# Altium PCB Master.PcbDoc (part 1 of 2)
Units mil, origin at the board's own origin, x right, y up, seen from the top; angles counter-clockwise.
Board outline 11420.03 x 8220.01 mil, 2 copper layers (Top Layer, Bottom Layer); 224 components, 0 nets, 1169 pads, 54 vias.
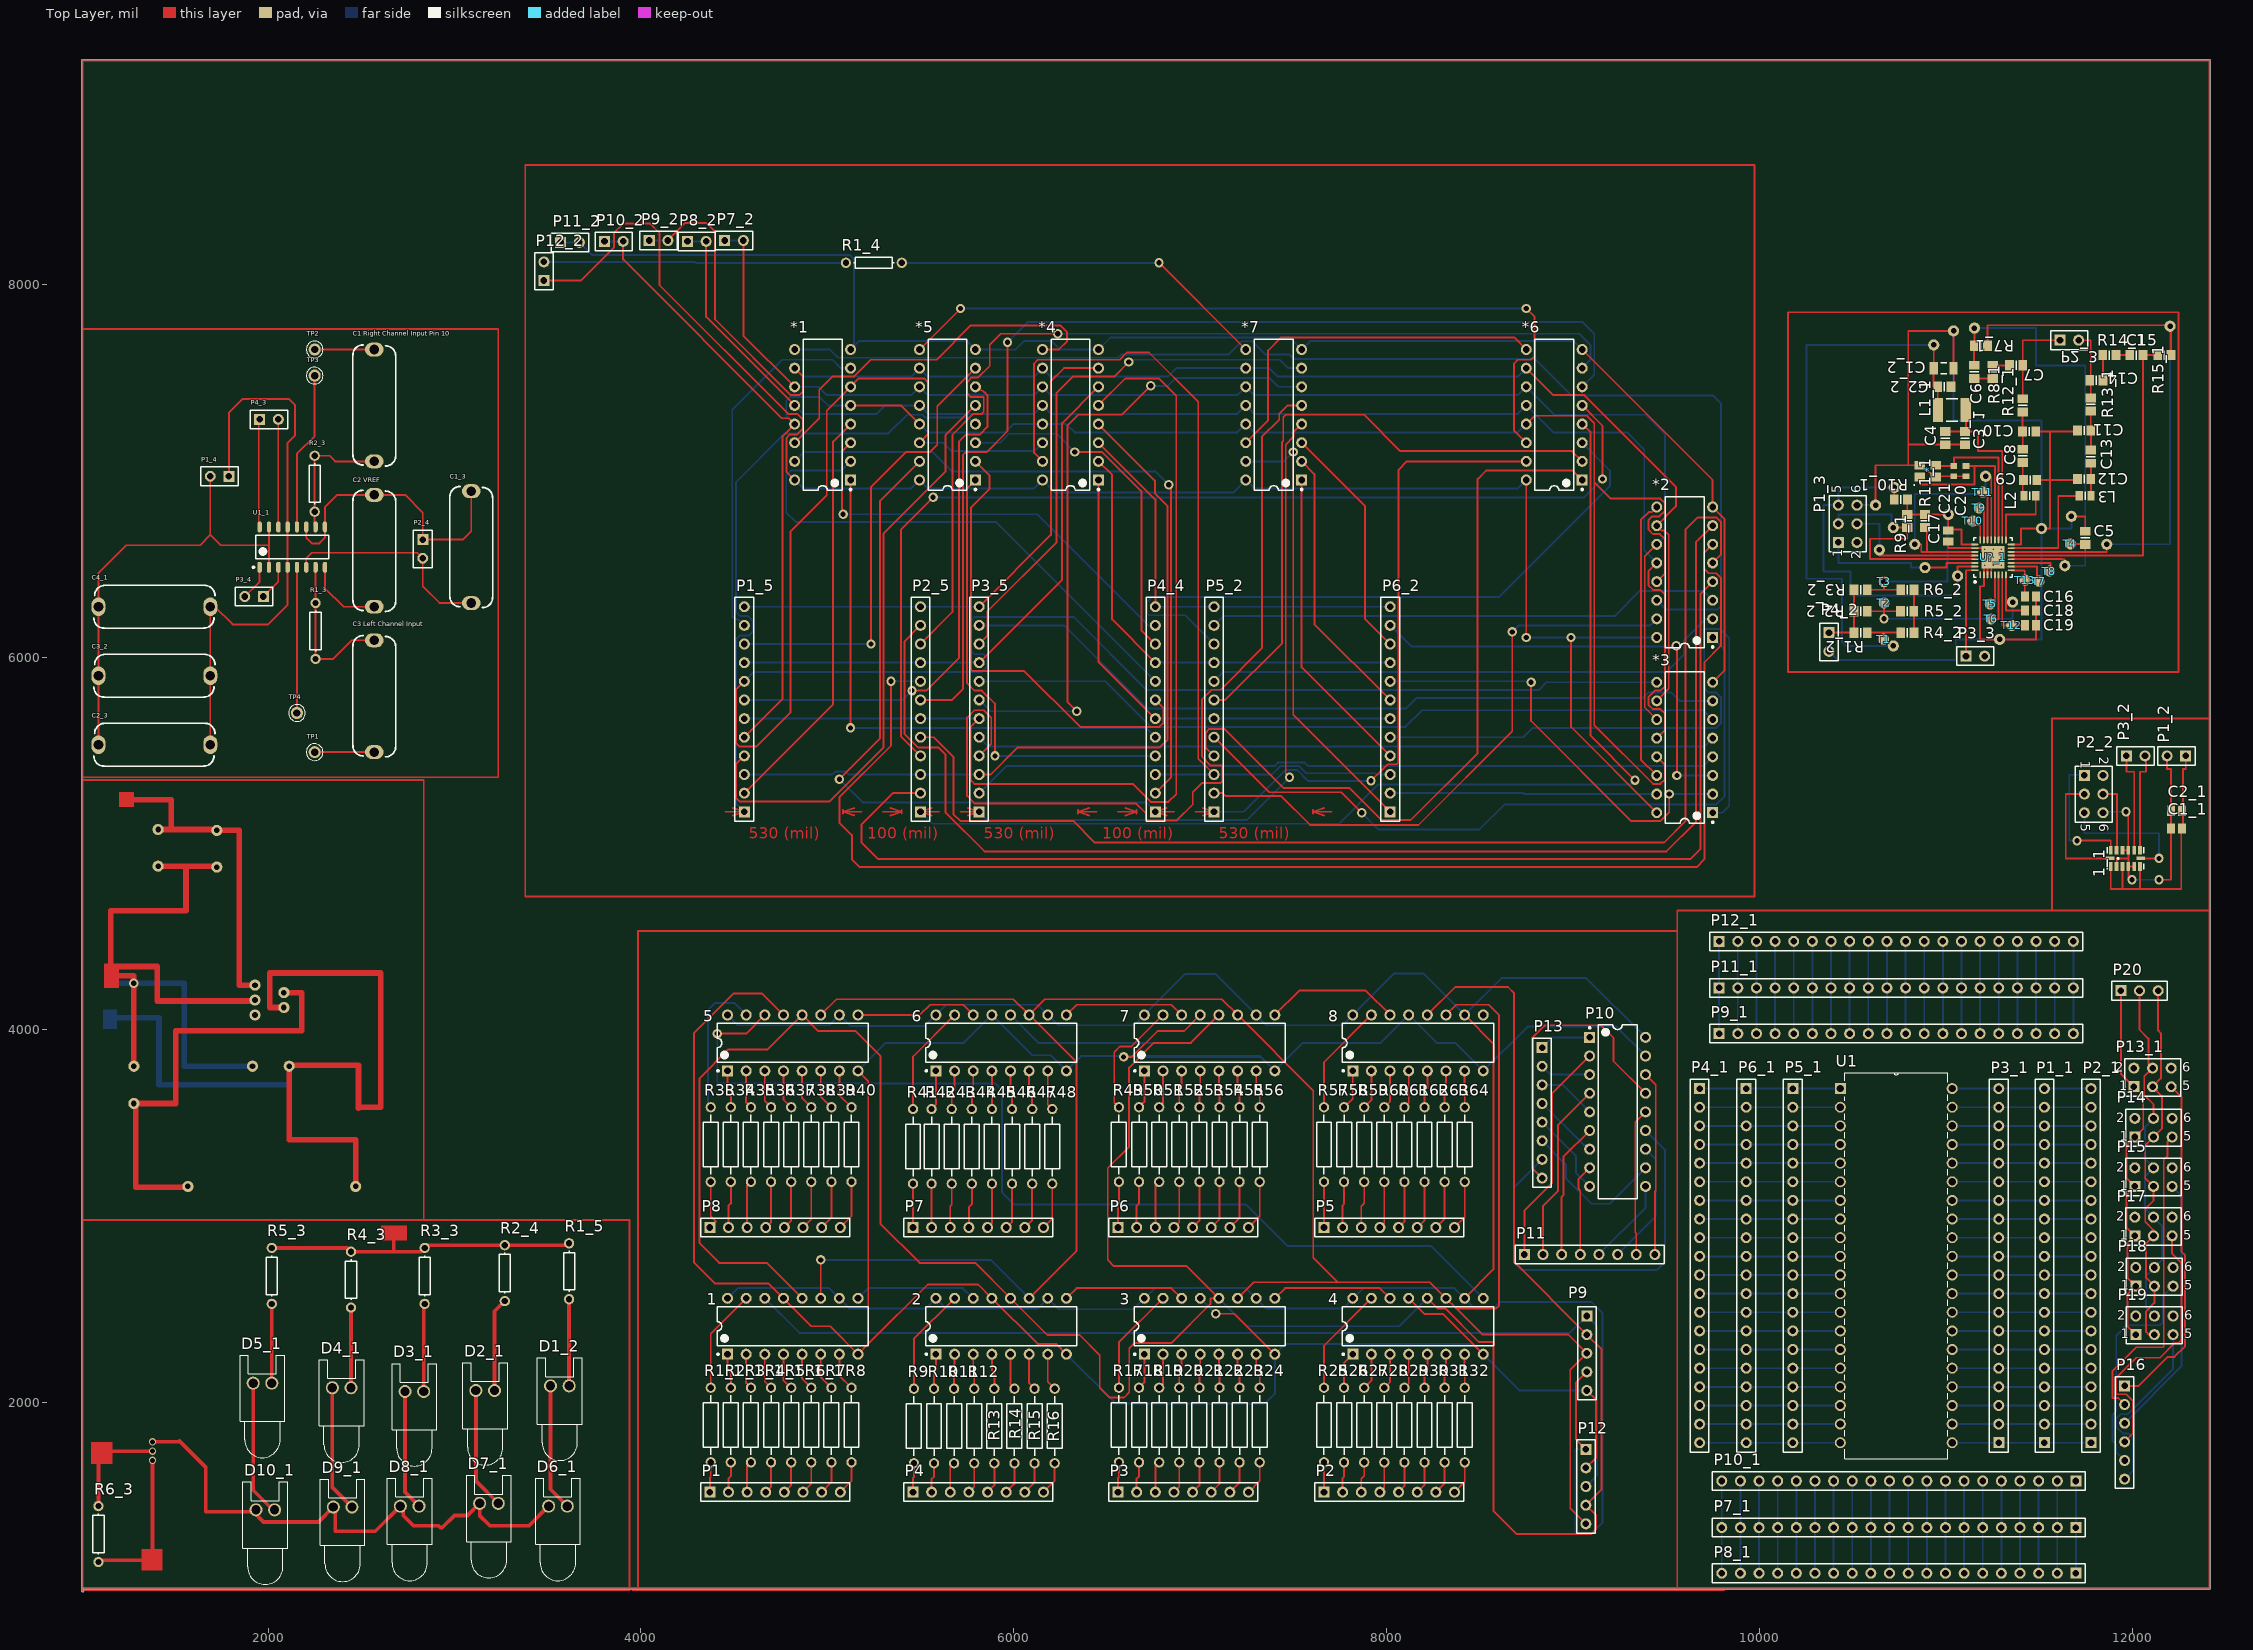
[diagram p0: Top Layer view]
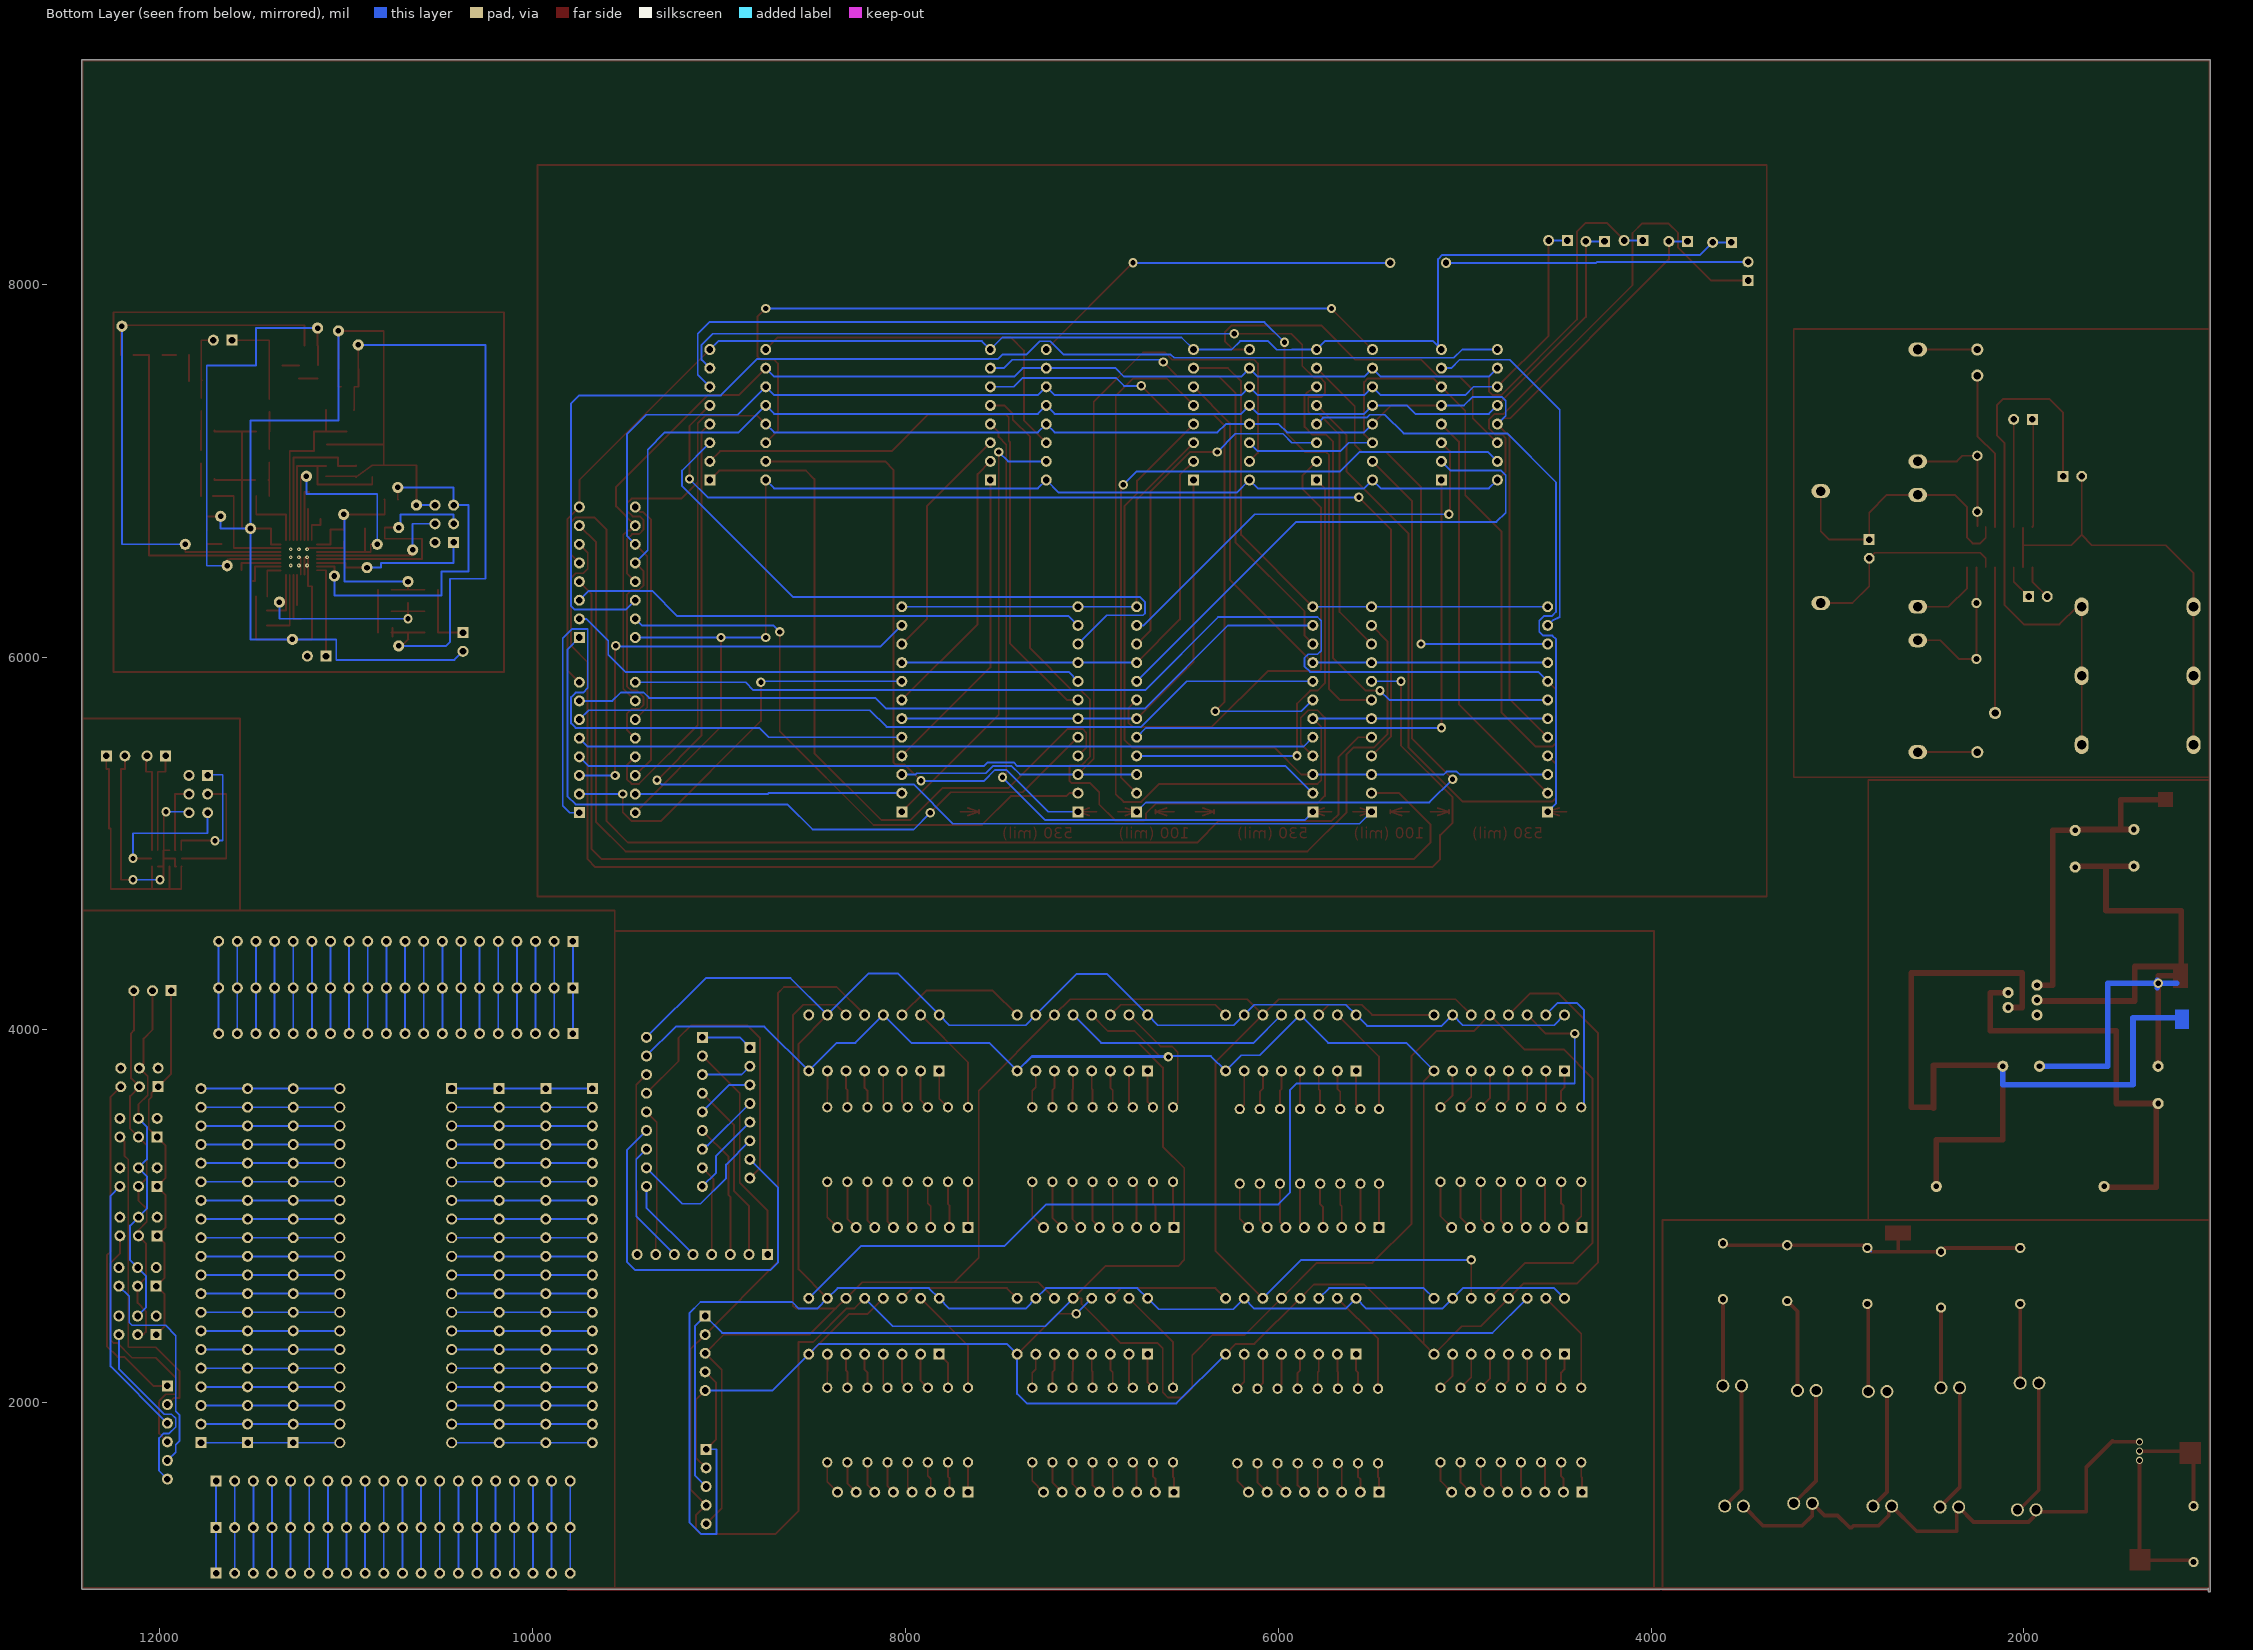
[diagram p1: Bottom Layer view, seen from below]

## Layer stack, top to bottom
Top Solder: solder mask 0.4, Solder Resist, Dk 3.5
Top Layer: signal copper 1.4
Dielectric 1: dielectric 12.6, FR-4, Dk 4.8
Bottom Layer: signal copper 1.4
Bottom Solder: solder mask 0.4, Solder Resist, Dk 3.5

## Board outline
999.99,990 999.99,9200 cw(c1005,9200) 1005,9205.01 12415,9205.01 cw(c12415,9200) 12420.01,9200 12420.01,1005 cw(c12415,1005) 12415,999.99 1015,999.99 cw(c1015,1005) 1010.01,1004.45 1010.01,990 cw(c1005,990)

## Design rules (kind name [scope] priority, off if disabled: settings)
Clearance [All] p1: gap=10
PolygonConnect [All] p1: connectstyle=Relief reliefconductorwidth=10 reliefentries=4 polygonreliefangle="90 Angle" airgapwidth=10
RoomDefinition IRLED_1 [InComponentClass('IRLED')] p1: confinementstyle=ConfineIn formatcopy=TRUE lockcomponents=FALSE outline 1015,2980 3940,2980 3940,995 1015,995
RoomDefinition "Senior design LED matrix 3.0" [InComponentClass('Senior design LED matrix 3.0')] p2: confinementstyle=ConfineIn formatcopy=TRUE lockcomponents=FALSE outline 3385,4735 9985,4735 9985,8640.01 3385,8640.01
RoomDefinition "PAM 8403 Breakout Board" [InComponentClass('PAM 8403 Breakout Board')] p3: confinementstyle=ConfineIn formatcopy=TRUE lockcomponents=FALSE outline 3235,5360 3235,7760 1035,7760 1035,5360
RoomDefinition MCU [InComponentClass('MCU')] p4: confinementstyle=ConfineIn formatcopy=TRUE lockcomponents=FALSE outline 9610,1020 12415,1020 12415,4640 9610,4640
RoomDefinition CLRC663Design [InComponentClass('CLRC663Design')] p5: confinementstyle=ConfineIn formatcopy=TRUE lockcomponents=FALSE outline 12250.12,5920 12250.12,7850 10155,7850 10155,5920
RoomDefinition LEDCube [InComponentClass('LEDCube')] p6: confinementstyle=ConfineIn formatcopy=TRUE lockcomponents=FALSE outline 3985,995 9810,995 9810,4530 3985,4530
RoutingVias [All] p1: holewidth=28 width=50 viastyle="Through Hole" minholewidth=28 minwidth=50 maxholewidth=28 maxwidth=50
SolderMaskExpansion [All] p1: expansion=4
Width [All] p1: maxlimit=10 minlimit=10 preferedwidth=10
30 further rules are at their usual default settings.

## Components (designator, comment, footprint, x,y, rotation, side; value= is the part's Value field where it differs from the comment)
1 "74HC595" DIP-16 4815,2410 r90 top
1_1 "LIS302DL" LGA14_LIS302DL(Primary) 11964.25,4920 r180 top (schematic designator 1)
2 "74HC595" DIP-16 5933.1,2410 r90 top
3 "74HC595" DIP-16 7051.19,2410 r90 top
4 "74HC595" DIP-16 8169.29,2410 r90 top
5 "74HC595" DIP-16 4815,3930 r90 top
6 "74HC595" DIP-16 5933.1,3930 r90 top
7 "74HC595" DIP-16 7051.19,3930 r90 top
8 "74HC595" DIP-16 8169.29,3930 r90 top
* "Crystal" DFN220P355X80-4N 10904.25,6997.44 r0 top
*1 "Red_1" DIP-16 4975,7300 r180 top
*2 "Red_2" DIP-16 9600,6455 r180 top
*3 "Red_3" DIP-16 9600,5515 r180 top
*4 "Ground" DIP-16 6305,7300 r180 top
*5 "Green_1" DIP-16 5645,7300 r180 top
*6 "Green_2" DIP-16 8900,7300 r180 top
*7 "Green_3" DIP-16 7395,7300 r180 top
"C1 Right Channel Input Pin 10" "Cap" "Rad .6" 2570,7350 r90 top
C1_1 "Cap" C0805 12239.25,5080 r180 top (schematic designator C1)
C1_2 "Cap" C1206 10989.25,7550 r0 top (schematic designator C1)
C1_3 "Cap" "Rad .6" 3090,6590 r270 top (schematic designator C1)
"C2 VREF" "Cap" "Rad .6" 2570,6570 r90 top
C2_1 "Cap" C0805 12239.25,5175 r180 top (schematic designator C2)
C2_2 "Cap" 6-0805_N 10993.39,7450 r0 top (schematic designator C2)
C2_3 "Cap" "Rad .6" 1390,5530 r180 top (schematic designator C2)
"C3 Left Channel Input" "Cap" "Rad .6" 2570,5790 r270 top
C3_1 "Cap" 6-0805_N 11103.39,7175 r270 top (schematic designator C3)
C3_2 "Cap" "Rad .6" 1390,5900 r180 top (schematic designator C3)
C4 "Cap" 6-0805_N 10998.39,7175 r270 top
C4_1 "Cap" "Rad .6" 1390,6270 r180 top (schematic designator C4)
C5 "Cap" 6-0805_N 11749.25,6640 r90 top
C6 "Cap" 6-0805_N 11153.39,7530 r90 top
C7 "Cap" 6-0805_N 11378.39,7565 r0 top
C8 "Cap" 6-0805_N 11413.39,7080 r270 top
C9 "Cap" 6-0805_N 11453.39,6950 r180 top
C10 "Cap" 6-0805_N 11448.39,7210 r0 top
C11 "Cap" 6-0805_N 11743.39,7215 r0 top
C12 "Cap" 6-0805_N 11743.39,6955 r180 top
C13 "Cap" 6-0805_N 11778.39,7075 r270 top
C14 "Cap" 6-0805_N 11808.39,7485 r0 top
C15 "Cap" 6-0805_N 12023.39,7620 r0 top
C16 "Cap Pol3" C0805 11454.25,6325 r0 top
C17 "Cap Pol3" C0805 11014.25,6650 r270 top
C18 "Cap Pol3" C0805 11454.25,6250 r0 top
C19 "Cap Pol3" C0805 11454.25,6170 r0 top
C20 "Cap Semi" 1608[0603] 11109.25,6997.44 r90 top
C21 "Cap Semi" 1608[0603] 11044.25,6997.44 r90 top
D1_2 "LED0" LED-0 3565,2090 r0 top (schematic designator D1)
D2_1 "LED0" LED-0 3165,2065 r0 top (schematic designator D2)
D3_1 "LED0" LED-0 2785,2060 r0 top (schematic designator D3)
D4_1 "LED0" LED-0 2395,2080 r0 top (schematic designator D4)
D5_1 "LED0" LED-0 1970,2105 r0 top (schematic designator D5)
D6_1 "LED0" LED-0 3555,1445 r0 top (schematic designator D6)
D7_1 "LED0" LED-0 3185,1460 r0 top (schematic designator D7)
D8_1 "LED0" LED-0 2760,1445 r0 top (schematic designator D8)
D9_1 "LED0" LED-0 2400,1440 r0 top (schematic designator D9)
D10_1 "LED0" LED-0 1985,1425 r0 top (schematic designator D10)
L1_1 "Inductor" INDC4532 11033.39,7325 r180 top (schematic designator L1)
L2 "Inductor" 6-0805_L 11451.89,6865 r180 top
L3 "Inductor" 6-0805_L 11748.39,6865 r0 top
P1 "Header 8" HDR1X8 4370,1520 r0 top
P1_1 "Header 20" HDR1X20 11530,1785 r90 top (schematic designator P1)
P1_2 "Power" HDR1X2 12287.99,5470 r180 top (schematic designator P1)
P1_3 "SPI" HDR2X3#1 10424.25,6615 r90 top (schematic designator P1)
P1_4 "Header 2" HDR1X2 1790,6970 r180 top (schematic designator P1)
P1_5 "Header 12" HDR1X12 4555,5170 r90 top (schematic designator P1)
P2 "Header 8" HDR1X8 7665,1520 r0 top
P2_1 "Header 20" HDR1X20 11780,1785 r90 top (schematic designator P2)
P2_2 "SPI Header" HDR2X3#2 11744.25,5365 r270 top (schematic designator P2)
P2_3 "Header 2" HDR1X2 11613.39,7700 r0 top (schematic designator P2)
P2_4 "Header 2" HDR1X2 2830,6630 r270 top (schematic designator P2)
P2_5 "Header 12" HDR1X12 5500,5170 r90 top (schematic designator P2)
P3 "Header 8" HDR1X8 6560,1520 r0 top
P3_1 "Header 20" HDR1X20 11285,1785 r90 top (schematic designator P3)
P3_2 "Interrupt" HDR1X2 11969.25,5470 r0 top (schematic designator P3)
P3_3 "Interrupt" HDR1X2 11109.25,6005 r0 top (schematic designator P3)
P3_4 "Header 2" HDR1X2 1975,6325 r180 top (schematic designator P3)
P3_5 "Header 12" HDR1X12 5815,5170 r90 top (schematic designator P3)
P4 "Header 8" HDR1X8 5460,1520 r0 top
P4_1 "Header 20" HDR1X20 9680,3685 r270 top (schematic designator P4)
P4_2 "Power" HDR1X2 10374.25,6130.87 r270 top (schematic designator P4)
P4_3 "Header 2" HDR1X2 1955,7275 r0 top (schematic designator P4)
P4_4 "Header 12" HDR1X12 6760,5170 r90 top (schematic designator P4)
P5 "Header 8" HDR1X8 7665,2940 r0 top
P5_1 "Header 20" HDR1X20 10180,3685 r270 top (schematic designator P5)
P5_2 "Header 12" HDR1X12 7075,5170 r90 top (schematic designator P5)
P6 "Header 8" HDR1X8 6560,2940 r0 top
P6_1 "Header 20" HDR1X20 9930,3685 r270 top (schematic designator P6)
P6_2 "Header 12" HDR1X12 8020,5170 r90 top (schematic designator P6)
P7 "Header 8" HDR1X8 5460,2940 r0 top
P7_1 "Header 20" HDR1X20 11699,1330 r180 top (schematic designator P7)
P7_2 "11" HDR1X2 4450,8235 r0 top (schematic designator P7)
P8 "Header 8" HDR1X8 4370,2940 r0 top
P8_1 "Header 20" HDR1X20 11699,1085 r180 top (schematic designator P8)
P8_2 "12" HDR1X2 4250,8230 r0 top (schematic designator P8)
P9 "Header 5" HDR1X5 9075,2465 r270 top
P9_1 "Header 20" HDR1X20 9785,3980 r0 top (schematic designator P9)
P9_2 "10" HDR1X2 4045,8235 r0 top (schematic designator P9)
P10 "Darlinton transistorLeftToAVR" DIP-18 9240,3560 r0 top
P10_1 "Header 20" HDR1X20 11699,1580 r180 top (schematic designator P10)
P10_2 "13" HDR1X2 3805,8230 r0 top (schematic designator P10)
P11 "Cube Layer" HDR1X8 8740,2795 r0 top
P11_1 "Header 20" HDR1X20 9785,4225 r0 top (schematic designator P11)
P11_2 "Ground 8" HDR1X2 3570,8225 r0 top (schematic designator P11)
P12 "Matrix" HDR1X5 9070,1750 r270 top
P12_1 "Header 20" HDR1X20 9785,4475 r0 top (schematic designator P12)
P12_2 "1 (Power) 2 (Ground)" HDR1X2 3480,8020 r90 top (schematic designator P12)
P13 "AVR" HDR1X8 8835,3905 r270 top
P13_1 "Header 3X2" HDR2X3#2 12010,3695 r0 top (schematic designator P13)
P14 "Header 3X2" HDR2X3#2 12015,3425 r0 top
P15 "Header 3X2" HDR2X3#2 12015,3160 r0 top
P16 "Header 6" HDR1X6 11960,2090 r270 top
P17 "Header 3X2" HDR2X3#2 12015,2895 r0 top
P18 "Header 3X2" HDR2X3#2 12020,2625 r0 top
P19 "Header 3X2" HDR2X3#2 12020,2365 r0 top
P20 "Header 3" HDR1X3 11940,4210 r0 top
R1_1 "Res2" AXIAL-0.4 4374.88,1880 r270 top (schematic designator R1)
R1_2 "0R DNP" 6-0805_N 10544.25,6130.87 r180 top (schematic designator R1)
R1_3 "Res1" AXIAL-0.3 2255,6140 r90 top (schematic designator R1)
R1_4 "Res1" AXIAL-0.3 5250,8115 r180 top (schematic designator R1)
R1_5 "Res1" AXIAL-0.3 3615,2705 r90 top (schematic designator R1)
R2_1 "Res2" AXIAL-0.4 4482.76,1880 r270 top (schematic designator R2)
R2_2 "0R DNP" 6-0805_N 10544.25,6245.87 r180 top (schematic designator R2)
R2_3 "Res1" AXIAL-0.3 2250,6930 r270 top (schematic designator R2)
R2_4 "Res1" AXIAL-0.3 3270,2695 r90 top (schematic designator R2)
R3_1 "Res2" AXIAL-0.4 4590.63,1880 r270 top (schematic designator R3)
R3_2 "0R DNP" 6-0805_N 10544.25,6360.87 r180 top (schematic designator R3)
R3_3 "Res1" AXIAL-0.3 2840,2680 r90 top (schematic designator R3)
R4_1 "Res2" AXIAL-0.4 4698.5,1880 r270 top (schematic designator R4)
R4_2 "0R DNP" 6-0805_N 10794.25,6130.87 r180 top (schematic designator R4)
R4_3 "Res1" AXIAL-0.3 2445,2660 r90 top (schematic designator R4)
R5_1 "Res2" AXIAL-0.4 4806.38,1880 r270 top (schematic designator R5)
R5_2 "0R" 6-0805_N 10793.82,6245.87 r180 top (schematic designator R5)
R5_3 "Res1" AXIAL-0.3 2020,2680 r90 top (schematic designator R5)
R6_1 "Res2" AXIAL-0.4 4914.25,1880 r270 top (schematic designator R6)
R6_2 "0R" 6-0805_N 10794.25,6360.87 r180 top (schematic designator R6)
R6_3 "Res1" AXIAL-0.3 1090,1295 r90 top (schematic designator R6)
R7 "Res2" AXIAL-0.4 5022.13,1880 r270 top
R7_1 "Res3" 6-0805_N 11188.39,7670 r0 top (schematic designator R7)
R8 "Res2" AXIAL-0.4 5130,1880 r270 top
R8_1 "Res3" 6-0805_N 11253.39,7530 r90 top (schematic designator R8)
R9 "Res2" AXIAL-0.4 5464.88,1875 r270 top
R9_1 "Res3" 6-0805_N 10794.25,6730 r90 top (schematic designator R9)
R10 "Res2" AXIAL-0.4 5572.76,1875 r270 top
R10_1 "Res3" 6-0805_N 10759.25,6845 r0 top (schematic designator R10)
R11 "Res2" AXIAL-0.4 5680.63,1875 r270 top
R11_1 "Res3" 6-0805_N 10889.25,6730 r90 top (schematic designator R11)
R12 "Res2" AXIAL-0.4 5788.5,1875 r270 top
R12_1 "Res3" 6-0805_N 11413.39,7350 r90 top (schematic designator R12)
R13 "Res2" AXIAL-0.4 5896.38,1875 r270 top
R13_1 "Res3" 6-0805_N 11778.39,7355 r90 top (schematic designator R13)
R14 "Res2" AXIAL-0.4 6004.25,1875 r270 top
R14_1 "Res3" 6-0805_N 11878.39,7620 r180 top (schematic designator R14)
R15 "Res2" AXIAL-0.4 6112.13,1875 r270 top
R15_1 "Res3" 6-0805_N 12173.39,7620 r0 top (schematic designator R15)
R16 "Res2" AXIAL-0.4 6220,1875 r270 top
R17 "Res2" AXIAL-0.4 6564.88,1880 r270 top
R18 "Res2" AXIAL-0.4 6672.76,1880 r270 top
R19 "Res2" AXIAL-0.4 6780.63,1880 r270 top
R20 "Res2" AXIAL-0.4 6888.5,1880 r270 top
R21 "Res2" AXIAL-0.4 6996.38,1880 r270 top
R22 "Res2" AXIAL-0.4 7104.25,1880 r270 top
R23 "Res2" AXIAL-0.4 7212.13,1880 r270 top
R24 "Res2" AXIAL-0.4 7320,1880 r270 top
R25 "Res2" AXIAL-0.4 7664.88,1880 r270 top
R26 "Res2" AXIAL-0.4 7772.76,1880 r270 top
R27 "Res2" AXIAL-0.4 7880.63,1880 r270 top
R28 "Res2" AXIAL-0.4 7988.5,1880 r270 top
R29 "Res2" AXIAL-0.4 8096.38,1880 r270 top
R30 "Res2" AXIAL-0.4 8204.25,1880 r270 top
R31 "Res2" AXIAL-0.4 8312.13,1880 r270 top
R32 "Res2" AXIAL-0.4 8420,1880 r270 top
R33 "Res2" AXIAL-0.4 4374.88,3385 r90 top
R34 "Res2" AXIAL-0.4 4482.76,3385 r90 top
R35 "Res2" AXIAL-0.4 4590.63,3385 r90 top
R36 "Res2" AXIAL-0.4 4698.5,3385 r90 top
R37 "Res2" AXIAL-0.4 4806.38,3385 r90 top
R38 "Res2" AXIAL-0.4 4914.25,3385 r90 top
R39 "Res2" AXIAL-0.4 5022.13,3385 r90 top
R40 "Res2" AXIAL-0.4 5130,3385 r90 top
R41 "Res2" AXIAL-0.4 5460,3375 r90 top
R42 "Res2" AXIAL-0.4 5559.88,3375 r90 top
R43 "Res2" AXIAL-0.4 5667.76,3375 r90 top
R44 "Res2" AXIAL-0.4 5775.63,3375 r90 top
R45 "Res2" AXIAL-0.4 5883.5,3375 r90 top
R46 "Res2" AXIAL-0.4 5991.38,3375 r90 top
R47 "Res2" AXIAL-0.4 6099.25,3375 r90 top
R48 "Res2" AXIAL-0.4 6207.13,3375 r90 top
R49 "Res2" AXIAL-0.4 6564.88,3385 r90 top
R50 "Res2" AXIAL-0.4 6672.76,3385 r90 top
R51 "Res2" AXIAL-0.4 6780.63,3385 r90 top
R52 "Res2" AXIAL-0.4 6888.5,3385 r90 top
R53 "Res2" AXIAL-0.4 6996.38,3385 r90 top
R54 "Res2" AXIAL-0.4 7104.25,3385 r90 top
R55 "Res2" AXIAL-0.4 7212.13,3385 r90 top
R56 "Res2" AXIAL-0.4 7320,3385 r90 top
R57 "Res2" AXIAL-0.4 7664.88,3385 r90 top
R58 "Res2" AXIAL-0.4 7772.76,3385 r90 top
R59 "Res2" AXIAL-0.4 7880.63,3385 r90 top
R60 "Res2" AXIAL-0.4 7988.5,3385 r90 top
R61 "Res2" AXIAL-0.4 8096.38,3385 r90 top
R62 "Res2" AXIAL-0.4 8204.25,3385 r90 top
R63 "Res2" AXIAL-0.4 8312.13,3385 r90 top
R64 "Res2" AXIAL-0.4 8420,3385 r90 top
T1 "TVDD" PCBComponent_1 60281.75,55780.87 r0 top
T2 "VDD" PCBComponent_1 60284.68,55975.87 r0 top
T3 "PVDD" PCBComponent_1 60284.68,56090.87 r0 top
T4 "VMID" PCBComponent_1 -37945.75,-43077.56 r180 top
T5 "SIGIN" PCBComponent_1 -38375.75,-43400 r180 top
T6 "SIGOUT" PCBComponent_1 60928.39,-43410.43 r270 top
T7 "AUX1" PCBComponent_1 -38184.02,56022.44 r90 top
T8 "AUX2" PCBComponent_1 -38058.19,-43223.27 r180 top
T9 "SCL2" PCBComponent_1 -38504.88,56415 r90 top
T10 "SDA2" PCBComponent_1 -38469.88,-42955 r180 top locked
T11 "CLCKOUT" PCBComponent_1 -38485.75,56500 r90 top
T12 "DVDD" PCBComponent_1 -38330.75,55785 r90 top
T13 "AVDD" PCBComponent_1 -38189.02,-43272.13 r180 top locked
TP1 "TESTPOINT" "THROUGH HOLE TP" 2250,5490 r90 top
TP2 "TESTPOINT" "THROUGH HOLE TP" 2250,7650 r90 top
TP3 "TESTPOINT" "THROUGH HOLE TP" 2250,7510 r90 top
TP4 "TESTPOINT" "THROUGH HOLE TP" 2155,5700 r90 top
U1 "ATMEGA1284P-PU" DIP254P1524X483-40_ATMEGA1284P-PU(Primary) 11035,1785 r0 top
U1_1 "PAM8403" SOP127P600X175-16N 2130,6590 r90 top (schematic designator U1)
U?_1 "CLRC663" QFN50P500X500X100_HS-33N 11254.25,6535 r90 top (schematic designator U?)

## Footprints (in the part's own frame and the unit in brackets; to place one, negate y for a bottom-side part, rotate by r counter-clockwise, add the part's x,y. Pads: shape width x height; smd on the part's side, far side on the other; paste and mask are expansions set on the pad)
6-0805_L [mm] "Chip Resistor, Body 2.0x1.2mm, IPC High Density"
  rect 1x1.3 smd: 1(-0.8,0) 2(0.8,0)
  silkscreen extent 0,-0.55 0,0.55, body extent -1.07,-0.7 1.07,0.7, height 0.7
6-0805_N [mm] "Chip Resistor, Body 2.0x1.2mm, IPC Medium Density"
  rect 1.2x1.4 smd: 1(-0.9,0) 2(0.9,0)
  silkscreen extent 0,-0.6 0,0.6, body extent -1.07,-0.7 1.07,0.7, height 0.7
1608[0603] [mm] "Chip Capacitor, Body 1.6x0.8mm, IPC High Density"
  rect 0.8x0.9 smd: 1(-0.7,0) 2(0.7,0)
  body extent -0.87,-0.48 0.87,0.48, height 1.3
AXIAL-0.3 [mm] "Axial Device, Thru-Hole; 2 Leads; 0.3 in Pin Spacing"
  round 1.4 hole 0.85: 1(-3.81,0) 2(3.81,0)
  silkscreen extent -2.77,-0.76 2.77,0.76
AXIAL-0.4 [mm] "Axial Device, Thru-Hole; 2 Leads; 0.4 in Pin Spacing"
  round 1.4 hole 0.85: 1(-5.08,0) 2(5.08,0)
  silkscreen extent -4.06,-1.02 4.06,1.02
C0805 [mm] "Chip Capacitor, Body 2.0x1.3mm, IPC High Density"
  rect 1.1x1.4 smd: 1(-0.75,0) 2(0.75,0)
  body extent -1.1,-0.72 1.1,0.72, height 1.4
C1206 [mm] "Chip Capacitor, Body 3.2x1.6mm, IPC High Density"
  rect 1.1x1.7 smd: 1(-1.35,0) 2(1.35,0)
  silkscreen extent -0.4,-0.75 0.4,0.75, body extent -1.7,-0.9 1.7,0.9, height 1.3
DFN220P355X80-4N [mm] "DFN, 4-Leads, Body 2.90x3.55mm, Pitch 2.20mm, IPC Medium Density"
  rect 1.4x1.2 smd: 1(-1.1,-0.8) 2(-1.1,0.8) 3(1.1,0.8) 4(1.1,-0.8)
  silkscreen extent -1.9,-1.95 -1.8,-1.85, body extent -1.85,-1.5 1.85,1.5, height 0.8
DIP254P1524X483-40_ATMEGA1284P-PU(Primary) [mil]
  rect 59x59 hole 39 mask-1000: 1(-600,1900)
  round 59 hole 39 mask-1000: 2(-600,1800) 3(-600,1700) 4(-600,1600) 5(-600,1500) 6(-600,1400) 7(-600,1300) 9(-600,1100) 10(-600,1000) 11(-600,900) 12(-600,800) 13(-600,700) 14(-600,600) 15(-600,500) 16(-600,400) 17(-600,300) 18(-600,200) 19(-600,100) 20(-600,0) 21(0,0) 22(0,100) 23(0,200) 24(0,300) 25(0,400) 26(0,500) 27(0,600) 28(0,700) 29(0,800) 30(0,900) 31(0,1000) 32(0,1100) 33(0,1200) 34(0,1300) 35(0,1400) 36(0,1500) 37(0,1600) 38(0,1700) 39(0,1800) 40(0,1900)
  round 59 hole 39: 8(-600,1200)
  silkscreen extent -575,-85 -25,1985
DIP-16 [mm] "DIP; 16 Leads; Row Spacing 7.62 mm; Pitch 2.54 mm"
  rect 1.5x1.5 hole 0.9: 1(-3.81,8.89)
  round 1.5 hole 0.9: 2(-3.81,6.35) 3(-3.81,3.81) 4(-3.81,1.27) 5(-3.81,-1.27) 6(-3.81,-3.81) 7(-3.81,-6.35) 8(-3.81,-8.89) 9(3.81,-8.89) 10(3.81,-6.35) 11(3.81,-3.81) 12(3.81,-1.27) 13(3.81,1.27) 14(3.81,3.81) 15(3.81,6.35) 16(3.81,8.89)
  silkscreen extent -3.93,-10.3 2.65,10.31, body extent -3.6,-10.28 3.6,10.28, height 5.08
DIP-18 [mm] "DIP; 18 Leads; Row Spacing 7.62 mm; Pitch 2.54 mm"
  rect 1.5x1.5 hole 0.9: 1(-3.81,10.16)
  round 1.5 hole 0.9: 2(-3.81,7.62) 3(-3.81,5.08) 4(-3.81,2.54) 5(-3.81,0) 6(-3.81,-2.54) 7(-3.81,-5.08) 8(-3.81,-7.62) 9(-3.81,-10.16) 10(3.81,-10.16) 11(3.81,-7.62) 12(3.81,-5.08) 13(3.81,-2.54) 14(3.81,0) 15(3.81,2.54) 16(3.81,5.08) 17(3.81,7.62) 18(3.81,10.16)
  silkscreen extent -3.93,-11.85 2.65,11.85, body extent -3.6,-11.8 3.6,11.8, height 5.08
HDR1X2 [mm] "Connector; Header; 2 Position"
  rect 1.5x1.5 hole 0.9: 1(0,0)
  round 1.5 hole 0.9: 2(2.54,0)
  silkscreen extent -1.27,-1.27 3.81,1.27
HDR1X3 [mm] "Connector; Header; 3 Position"
  rect 1.5x1.5 hole 0.9: 1(0,0)
  round 1.5 hole 0.9: 2(2.54,0) 3(5.08,0)
  silkscreen extent -1.27,-1.27 6.35,1.27
HDR1X5 [mm] "Connector; Header; 5 Position"
  rect 1.5x1.5 hole 0.9: 1(0,0)
  round 1.5 hole 0.9: 2(2.54,0) 3(5.08,0) 4(7.62,0) 5(10.16,0)
  silkscreen extent -1.27,-1.27 11.43,1.27
HDR1X6 [mm] "Connector; Header; 6 Position"
  rect 1.5x1.5 hole 0.9: 1(0,0)
  round 1.5 hole 0.9: 2(2.54,0) 3(5.08,0) 4(7.62,0) 5(10.16,0) 6(12.7,0)
  silkscreen extent -1.27,-1.27 13.97,1.27
HDR1X8 [mm] "Connector; Header; 8 Position"
  rect 1.5x1.5 hole 0.9: 1(0,0)
  round 1.5 hole 0.9: 2(2.54,0) 3(5.08,0) 4(7.62,0) 5(10.16,0) 6(12.7,0) 7(15.24,0) 8(17.78,0)
  silkscreen extent -1.27,-1.27 19.05,1.27
HDR1X12 [mm] "Connector; Header; 12 Position"
  rect 1.5x1.5 hole 0.9: 1(0,0)
  round 1.5 hole 0.9: 2(2.54,0) 3(5.08,0) 4(7.62,0) 5(10.16,0) 6(12.7,0) 7(15.24,0) 8(17.78,0) 9(20.32,0) 10(22.86,0) 11(25.4,0) 12(27.94,0)
  silkscreen extent -1.27,-1.27 29.21,1.27
HDR1X20 [mm] "Connector; Header; 20 Position"
  rect 1.5x1.5 hole 0.9: 1(0,0)
  round 1.5 hole 0.9: 2(2.54,0) 3(5.08,0) 4(7.62,0) 5(10.16,0) 6(12.7,0) 7(15.24,0) 8(17.78,0) 9(20.32,0) 10(22.86,0) 11(25.4,0) 12(27.94,0) 13(30.48,0) 14(33.02,0) 15(35.56,0) 16(38.1,0) 17(40.64,0) 18(43.18,0) 19(45.72,0) 20(48.26,0)
  silkscreen extent -1.27,-1.27 49.53,1.27
HDR2X3#1 [mm] "Connector; Header; 3x2 Position"
  rect 1.5x1.5 hole 0.9: 1(0,0)
  round 1.5 hole 0.9: 2(0,-2.54) 3(2.54,0) 4(2.54,-2.54) 5(5.08,0) 6(5.08,-2.54)
  silkscreen extent -1.27,-3.81 6.35,1.27
HDR2X3#2 [mm] "Connector; Header; 3x2 Position"
  rect 1.5x1.5 hole 0.9: 1(0,0)
  round 1.5 hole 0.9: 2(0,2.54) 3(2.54,0) 4(2.54,2.54) 5(5.08,0) 6(5.08,2.54)
  silkscreen extent -1.27,-1.27 6.35,3.81
INDC4532 [mm] "Chip Inductor, Body 4.5x3.2mm, IPC High Density"
  rect 1.4x3.3 smd: 1(-1.9,0) 2(1.9,0)
  silkscreen extent -0.8,-1.55 0.8,1.55, body extent -2.4,-1.7 2.4,1.7, height 0.55
LED-0 [mil] "LED; 2 Leads"
  round 70 hole 50: 1(50,0) 2(-50,0)
  silkscreen extent -120,-400 120,150
LGA14_LIS302DL(Primary) [mm]
  rect 0.5x1.2 smd paste-25.4 mask-25.4: 1(2,1.1) 2(1.2,1.1) 3(0.4,1.1) 4(-0.4,1.1) 5(-1.2,1.1) 6(-2,1.1) 8(-2,-1.1) 9(-1.2,-1.1) 10(-0.4,-1.1) 11(0.4,-1.1) 12(1.2,-1.1) 13(2,-1.1)
  rect 1.2x0.5 smd paste-25.4 mask-25.4: 7(-2.1,0) 14(2.1,0)
  silkscreen extent -2.5,-1.5 2.5,1.5
PCBComponent_1 [mil]
  round 60 smd: 1(-49615,-49685)
QFN50P500X500X100_HS-33N [mm] "QFN, 32-Leads, Body 5.00x5.00mm, Pitch 0.50mm, Thermal Pad 3.10x3.10mm, IPC Medium Density"
  oval 0.95x0.25 smd: 1(-2.375,1.75) 2(-2.375,1.25) 3(-2.375,0.75) 4(-2.375,0.25) 5(-2.375,-0.25) 6(-2.375,-0.75) 7(-2.375,-1.25) 8(-2.375,-1.75) 17(2.375,-1.75) 18(2.375,-1.25) 19(2.375,-0.75) 20(2.375,-0.25) 21(2.375,0.25) 22(2.375,0.75) 23(2.375,1.25) 24(2.375,1.75)
  oval 0.25x0.95 smd: 9(-1.75,-2.475) 10(-1.25,-2.475) 11(-0.75,-2.475) 12(-0.25,-2.475) 13(0.25,-2.475) 14(0.75,-2.475) 15(1.25,-2.475) 16(1.75,-2.475) 25(1.75,2.475) 26(1.25,2.475) 27(0.75,2.475) 28(0.25,2.475) 29(-0.25,2.475) 30(-0.75,2.475) 31(-1.25,2.475) 32(-1.75,2.475)
  rect 3.1x3.1 smd: 33(0,0)
  silkscreen extent -3.47,-2.6 2.7,2.6, body extent -2.55,-2.45 2.55,2.45, height 1
"Rad .6" [mil] "Radial"
  oval 75x100 hole 52: 1(-300,0) 2(300,0)
  silkscreen extent -325,-115 325,115
SOP127P600X175-16N [mm] "SOP, 16-Leads, Body 9.90x3.90mm, Pitch 1.27mm, IPC Medium Density"
  oval 1.5x0.6 smd: 1(-2.75,4.445) 2(-2.75,3.175) 3(-2.75,1.905) 4(-2.75,0.635) 5(-2.75,-0.635) 6(-2.75,-1.905) 7(-2.75,-3.175) 8(-2.75,-4.445) 9(2.75,-4.445) 10(2.75,-3.175) 11(2.75,-1.905) 12(2.75,-0.635) 13(2.75,0.635) 14(2.75,1.905) 15(2.75,3.175) 16(2.75,4.445)
  silkscreen extent -2.87,-5 1.6,5.42, body extent -2,-5 2,5, height 1.75
"THROUGH HOLE TP" [mil]
  round 65 hole 40: 1(0,0)
  silkscreen extent -45,-45 45,45

## Part data
1 2 3 4 5 6 7 8 * *1 *2 *3 *4 *5 *6 *7: library part Component_1
"C1 Right Channel Input Pin 10" C1_2 C1_3 "C2 VREF" C2_2 C2_3 "C3 Left Channel Input" C3_1 C3_2 C4 C4_1 C5 C6 C7 C8 C9 C10 C11 C12 C13 C14 C15: "Capacitor"
C1_1 C2_1: library part "Cap Pol3", "Polarized Capacitor (Surface Mount)"
C16 C17 C18 C19: "Polarized Capacitor (Surface Mount)"
C20 C21: "Capacitor (Semiconductor SIM Model)"
D1_2 D2_1 D3_1 D4_1 D5_1 D6_1 D7_1 D8_1 D9_1 D10_1: "Typical INFRARED GaAs LED"
P1 P2 P3 P4 P5 P6 P7 P8: "Header, 8-Pin"
P1_1 P2_1 P3_1 P4_1 P5_1 P6_1 P7_1 P8_1 P9_1 P10_1 P11_1 P12_1: "Header, 20-Pin"
P1_2 P3_2 P3_3 P4_2 P7_2 P8_2 P9_2 P10_2 P11_2 P12_2: library part "Header 2", "Header, 2-Pin"
P1_3 P2_2: library part "Header 3X2", "Header, 3-Pin, Dual row"
P1_4 P2_3 P2_4 P3_4 P4_3: "Header, 2-Pin"
P1_5 P2_5 P3_5 P4_4 P5_2 P6_2: "Header, 12-Pin"
P9: "Header, 5-Pin"
P10: library part "Header 9X2", "Header, 9-Pin, Dual row"
P11 P13: library part "Header 8", "Header, 8-Pin"
P12: library part "Header 5", "Header, 5-Pin"
P13_1 P14 P15 P17 P18 P19: "Header, 3-Pin, Dual row"
P16: "Header, 6-Pin"
P20: "Header, 3-Pin"
R1_1 R1_3 R1_4 R1_5 R2_1 R2_3 R2_4 R3_1 R3_3 R4_1 R4_3 R5_1 R5_3 R6_1 R6_3 R7 R7_1 R8 R8_1 R9 R9_1 R10 R10_1 R11 R11_1 R12 R12_1 R13 R13_1 R14 R14_1 R15 R15_1 R16 R17 R18 R19 R20 R21 R22 R23 R24 R25 R26 R27 R28 R29 R30 R31 R32 R33 R34 R35 R36 R37 R38 R39 R40 R41 R42 R43 R44 R45 R46 R47 R48 R49 R50 R51 R52 R53 R54 R55 R56 R57 R58 R59 R60 R61 R62 R63 R64: "Resistor"
R1_2 R2_2 R3_2 R4_2 R5_2 R6_2: library part RESC0805, "RESC0805"
T1 T2 T3 T4 T5 T6 T7 T8 T9 T10 T11 T12 T13: library part Testpoint
TP1 TP2 TP3 TP4: library part TESTPOINT_2, "Through Hole Test Point"
U1_1: "PAM8403 Ausio Amplifier"

## Free pads (board coordinates)
  round 60 hole 30: 9(11214.25,6970) 10(11359.25,6295) 13(11639.25,6490) 14(11154.25,7765) 15(11514.25,6690) 16(10936.1,7675) 18(11064.25,6435) 19(10889.25,6480) 22(11864.25,6605) 23(12204.25,7775) 24(11674.25,6755) 25(11289.25,6095) 26(10644.25,6575) 27(11014.25,6765.43) 28(10669.25,6405) 29(10719.25,6060) 30(10724.25,6910) 31(10719.25,6694.57) 33(10624.25,6815) 35(11042.4,7750) 36(10834.25,6605) 37(1930,4240) 38(2085,4200) 39(2085,4120) 40(1930,4080) 41(1930,4160) 42(1570,3160) 43(2470,3160) 44(1725,5070) 45(1725,4873.15) 46(1410,4878.15) 47(1410,5075) 48(1916.57,3805) 49(2113.43,3805) 50(1280,3805) 51(1280,3605)

## Via types
v1: diameter 50, hole 28, Top Layer to Bottom Layer, 42 vias
v2: diameter 19.68, hole 7.87, Top Layer to Bottom Layer, 9 vias
v3: diameter 40, hole 27, Top Layer to Bottom Layer, 3 vias

## Nets (pads, with @x,y where several pads share a name; then routed paths per layer and width w, separated by ;. In a path a pad name is that pad's centre, name@x,y a point inside that pad or via, vN(x,y) a via of type N, cw(c..) or ccw(c..) an arc to the next point about the centre after c; other vN are vias at no path point)
pads on no net: 1.1 1.2 1.3 1.4 1.5 1.6 1.7 1.8 1.9 1.10 1.11 1.12 1.13 1.14 1.15 1.16 1_1.1 1_1.2 1_1.3 1_1.4 1_1.5 1_1.6 1_1.7 1_1.8 1_1.9 1_1.10 1_1.11 1_1.12 1_1.13 1_1.14 2.1 2.2 2.3 2.4 2.5 2.6 2.7 2.8 2.9 2.10 2.11 2.12 2.13 2.14 2.15 2.16 3.1 3.2 3.3 3.4 3.5 3.6 3.7 3.8 3.9 3.10 3.11 3.12 3.13 3.14 3.15 3.16 4.1 4.2 4.3 4.4 4.5 4.6 4.7 4.8 4.9 4.10 4.11 4.12 4.13 4.14 4.15 4.16 5.1 5.2 5.3 5.4 5.5 5.6 5.7 5.8 5.9 5.10 5.11 5.12 5.13 5.14 5.15 5.16 6.1 6.2 6.3 6.4 6.5 6.6 6.7 6.8 6.9 6.10 6.11 6.12 6.13 6.14 6.15 6.16 7.1 7.2 7.3 7.4 7.5 7.6 7.7 7.8 7.9 7.10 7.11 7.12 7.13 7.14 7.15 7.16 8.1 8.2 8.3 8.4 8.5 8.6 8.7 8.8 8.9 8.10 8.11 8.12 8.13 8.14 8.15 8.16 "C1 Right Channel Input Pin 10.1" "C1 Right Channel Input Pin 10.2" "C2 VREF.1" "C2 VREF.2" "C3 Left Channel Input.1" "C3 Left Channel Input.2" *1.1 *1.2 *1.3 *1.4 *1.5 *1.6 *1.7 *1.8 *1.9 *1.10 *1.11 *1.12 *1.13 *1.14 *1.15 *1.16 *2.1 *2.2 *2.3 *2.4 *2.5 *2.6 *2.7 *2.8 *2.9 *2.10 *2.11 *2.12 *2.13 *2.14 *2.15 *2.16 *3.1 *3.2 *3.3 *3.4 *3.5 *3.6 *3.7 *3.8 *3.9 *3.10 *3.11 *3.12 *3.13 *3.14 *3.15 *3.16 *4.1 *4.2 *4.3 *4.4 *4.5 *4.6 *4.7 *4.8 *4.9 *4.10 *4.11 *4.12 *4.13 *4.14 *4.15 *4.16 *5.1 *5.2 *5.3 *5.4 *5.5 *5.6 *5.7 *5.8 *5.9 *5.10 *5.11 *5.12 *5.13 *5.14 *5.15 *5.16 *6.1 *6.2 *6.3 *6.4 *6.5 *6.6 *6.7 *6.8 *6.9 *6.10 *6.11 *6.12 *6.13 *6.14 *6.15 *6.16 *7.1 *7.2 *7.3 *7.4 *7.5 *7.6 *7.7 *7.8 *7.9 *7.10 *7.11 *7.12 *7.13 *7.14 *7.15 *7.16 *.1 *.2 *.3 *.4 C1_1.1 C1_1.2 C1_2.1 C1_2.2 C1_3.1 C1_3.2 C2_1.1 C2_1.2 C2_2.1 C2_2.2 C2_3.1 C2_3.2 C3_1.1 C3_1.2 C3_2.1 C3_2.2 C4.1 C4.2 C4_1.1 C4_1.2 C5.1 C5.2 C6.1 C6.2 C7.1 C7.2 C8.1 C8.2 C9.1 C9.2 C10.1 C10.2 C11.1 C11.2 C12.1 C12.2 C13.1 C13.2 C14.1 C14.2 C15.1 C15.2 C16.1 C16.2 C17.1 C17.2 C18.1 C18.2 C19.1 C19.2 C20.1 C20.2 C21.1 C21.2 D1_2.1 D1_2.2 D2_1.1 D2_1.2 D3_1.1 D3_1.2 D4_1.1 D4_1.2 D5_1.1 D5_1.2 D6_1.1 D6_1.2 D7_1.1 D7_1.2 D8_1.1 D8_1.2 D9_1.1 D9_1.2 D10_1.1 D10_1.2 L1_1.1 L1_1.2 L2.1 L2.2 L3.1 L3.2 P1.1 P1.2 P1.3 P1.4 P1.5 P1.6 P1.7 P1.8 P1_1.1 P1_1.2 P1_1.3 P1_1.4 P1_1.5 P1_1.6 P1_1.7 P1_1.8 P1_1.9 P1_1.10 P1_1.11 P1_1.12 P1_1.13 P1_1.14 P1_1.15 P1_1.16 P1_1.17 P1_1.18 P1_1.19 P1_1.20 P1_2.1 P1_2.2 P1_3.1 P1_3.2 P1_3.3 P1_3.4 P1_3.5 P1_3.6 P1_4.1 P1_4.2 P1_5.1 P1_5.2 P1_5.3 P1_5.4 P1_5.5 P1_5.6 P1_5.7 P1_5.8 P1_5.9 P1_5.10 P1_5.11 P1_5.12 P2.1 P2.2 P2.3 P2.4 P2.5 P2.6 P2.7 P2.8 P2_1.1 P2_1.2 P2_1.3 P2_1.4 P2_1.5 P2_1.6 P2_1.7 P2_1.8 P2_1.9 P2_1.10 P2_1.11 P2_1.12 P2_1.13 P2_1.14 P2_1.15 P2_1.16 P2_1.17 P2_1.18 P2_1.19 P2_1.20 P2_2.1 P2_2.2 P2_2.3 P2_2.4 P2_2.5 P2_2.6 P2_3.1 P2_3.2 P2_4.1 P2_4.2 P2_5.1 P2_5.2 P2_5.3 P2_5.4 P2_5.5 P2_5.6 P2_5.7 P2_5.8 P2_5.9 P2_5.10 P2_5.11 P2_5.12 P3.1 P3.2 P3.3 P3.4 P3.5 P3.6 P3.7 P3.8 P3_1.1 P3_1.2 P3_1.3 P3_1.4 P3_1.5 P3_1.6 P3_1.7 P3_1.8 P3_1.9 P3_1.10 P3_1.11 P3_1.12 P3_1.13 P3_1.14 P3_1.15 P3_1.16 P3_1.17 P3_1.18 P3_1.19 P3_1.20 P3_2.1 P3_2.2 P3_3.1 P3_3.2 P3_4.1 P3_4.2 P3_5.1 P3_5.2 P3_5.3 P3_5.4 P3_5.5 P3_5.6 P3_5.7 P3_5.8 P3_5.9 P3_5.10 P3_5.11 P3_5.12 P4.1 P4.2 P4.3 P4.4 P4.5 P4.6 P4.7 P4.8 P4_1.1 P4_1.2 P4_1.3 P4_1.4 P4_1.5 P4_1.6 P4_1.7 P4_1.8 P4_1.9 P4_1.10 P4_1.11 P4_1.12 P4_1.13 P4_1.14 P4_1.15 P4_1.16 P4_1.17 P4_1.18 P4_1.19 P4_1.20 P4_2.1 P4_2.2 P4_3.1 P4_3.2 P4_4.1 P4_4.2 P4_4.3 P4_4.4 P4_4.5 P4_4.6 P4_4.7 P4_4.8 P4_4.9 P4_4.10 P4_4.11 P4_4.12 P5.1 P5.2 P5.3 P5.4 P5.5 P5.6 P5.7 P5.8 P5_1.1 P5_1.2 P5_1.3 P5_1.4 P5_1.5 P5_1.6 P5_1.7 P5_1.8 P5_1.9 P5_1.10 P5_1.11 P5_1.12 P5_1.13 P5_1.14 P5_1.15 P5_1.16 P5_1.17 P5_1.18 P5_1.19 P5_1.20 P5_2.1 P5_2.2 P5_2.3 P5_2.4 P5_2.5 P5_2.6 P5_2.7 P5_2.8 P5_2.9 P5_2.10 P5_2.11 P5_2.12 P6.1 P6.2 P6.3 P6.4 P6.5 P6.6 P6.7 P6.8 P6_1.1 P6_1.2 P6_1.3 P6_1.4 P6_1.5 P6_1.6 P6_1.7 P6_1.8 P6_1.9 P6_1.10 P6_1.11 P6_1.12 P6_1.13 P6_1.14 P6_1.15 P6_1.16 P6_1.17 P6_1.18 P6_1.19 P6_1.20 P6_2.1 P6_2.2 P6_2.3 P6_2.4 P6_2.5 P6_2.6 P6_2.7 P6_2.8 P6_2.9 P6_2.10 P6_2.11 P6_2.12 P7.1 P7.2 P7.3 P7.4 P7.5 P7.6 P7.7 P7.8 P7_1.1 P7_1.2 P7_1.3 P7_1.4 P7_1.5 P7_1.6 P7_1.7 P7_1.8 P7_1.9 P7_1.10 P7_1.11 P7_1.12 P7_1.13 P7_1.14 P7_1.15 P7_1.16 P7_1.17 P7_1.18 P7_1.19 P7_1.20 P7_2.1 P7_2.2 P8.1 P8.2 P8.3 P8.4 P8.5 P8.6 P8.7 P8.8 P8_1.1 P8_1.2 P8_1.3 P8_1.4 P8_1.5 P8_1.6 P8_1.7 P8_1.8 P8_1.9 P8_1.10 P8_1.11 P8_1.12 P8_1.13 P8_1.14 P8_1.15 P8_1.16 P8_1.17 P8_1.18 P8_1.19 P8_1.20 P8_2.1 P8_2.2 P9.1 P9.2 P9.3 P9.4 P9.5 P9_1.1 P9_1.2 P9_1.3 P9_1.4 P9_1.5 P9_1.6 P9_1.7 P9_1.8 P9_1.9 P9_1.10 P9_1.11 P9_1.12 P9_1.13 P9_1.14 P9_1.15 P9_1.16 P9_1.17 P9_1.18 P9_1.19 P9_1.20 P9_2.1 P9_2.2 P10.1 P10.2 P10.3 P10.4 P10.5 P10.6 P10.7 P10.8 P10.9 P10.10 P10.11 P10.12 P10.13 P10.14 P10.15 P10.16 P10.17 P10.18 P10_1.1 P10_1.2 P10_1.3 P10_1.4 P10_1.5 P10_1.6 P10_1.7 P10_1.8 P10_1.9 P10_1.10 P10_1.11 P10_1.12 P10_1.13 P10_1.14 P10_1.15 P10_1.16 P10_1.17 P10_1.18 P10_1.19 P10_1.20 P10_2.1 P10_2.2 P11.1 P11.2 P11.3 P11.4 P11.5 P11.6 P11.7 P11.8 P11_1.1 P11_1.2 P11_1.3 P11_1.4 P11_1.5 P11_1.6 P11_1.7 P11_1.8 P11_1.9 P11_1.10 P11_1.11 P11_1.12 P11_1.13 P11_1.14 P11_1.15 P11_1.16 P11_1.17 P11_1.18 P11_1.19 P11_1.20 P11_2.1 P11_2.2 P12.1 P12.2 P12.3 P12.4 P12.5 P12_1.1 P12_1.2 P12_1.3 P12_1.4 P12_1.5 P12_1.6 P12_1.7 P12_1.8 P12_1.9 P12_1.10 P12_1.11 P12_1.12 P12_1.13 P12_1.14 P12_1.15 P12_1.16 P12_1.17 P12_1.18 P12_1.19 P12_1.20 P12_2.1 P12_2.2 P13.1 P13.2 P13.3 P13.4 P13.5 P13.6 P13.7 P13.8 P13_1.1 P13_1.2 P13_1.3 P13_1.4 P13_1.5 P13_1.6 P14.1 P14.2 P14.3 P14.4 P14.5 P14.6 P15.1 P15.2 P15.3 P15.4 P15.5 P15.6 P16.1 P16.2 P16.3 P16.4 P16.5 P16.6 P17.1 P17.2 P17.3 P17.4 P17.5 P17.6 P18.1 P18.2 P18.3 P18.4 P18.5 P18.6 P19.1 P19.2 P19.3 P19.4 P19.5 P19.6 P20.1 P20.2 P20.3 R1_1.1 R1_1.2 R1_2.1 R1_2.2 R1_3.1 R1_3.2 R1_4.1 R1_4.2 R1_5.1 R1_5.2 R2_1.1 R2_1.2 R2_2.1 R2_2.2 R2_3.1 R2_3.2 R2_4.1 R2_4.2 R3_1.1 R3_1.2 R3_2.1 R3_2.2 R3_3.1 R3_3.2 R4_1.1 R4_1.2 R4_2.1 R4_2.2 R4_3.1 R4_3.2 R5_1.1 R5_1.2 R5_2.1 R5_2.2 R5_3.1 R5_3.2 R6_1.1 R6_1.2 R6_2.1 R6_2.2 R6_3.1 R6_3.2 R7.1 R7.2 R7_1.1 R7_1.2 R8.1 R8.2 R8_1.1 R8_1.2 R9.1 R9.2 R9_1.1 R9_1.2 R10.1 R10.2 R10_1.1 R10_1.2 R11.1 R11.2 R11_1.1 R11_1.2 R12.1 R12.2 R12_1.1 R12_1.2 R13.1 R13.2 R13_1.1 R13_1.2 R14.1 R14.2 R14_1.1 R14_1.2 R15.1 R15.2 R15_1.1 R15_1.2 R16.1 R16.2 R17.1 R17.2 R18.1 R18.2 R19.1 R19.2 R20.1 R20.2 R21.1 R21.2 R22.1 R22.2 R23.1 R23.2 R24.1 R24.2 R25.1 R25.2 R26.1 R26.2 R27.1 R27.2 R28.1 R28.2 R29.1 R29.2 R30.1 R30.2 R31.1 R31.2 R32.1 R32.2 R33.1 R33.2 R34.1 R34.2 R35.1 R35.2 R36.1 R36.2 R37.1 R37.2 R38.1 R38.2 R39.1 R39.2 R40.1 R40.2 R41.1 R41.2 R42.1 R42.2 R43.1 R43.2 R44.1 R44.2 R45.1 R45.2 R46.1 R46.2 R47.1 R47.2 R48.1 R48.2 R49.1 R49.2 R50.1 R50.2 R51.1 R51.2 R52.1 R52.2 R53.1 R53.2 R54.1 R54.2 R55.1 R55.2 R56.1 R56.2 R57.1 R57.2 R58.1 R58.2 R59.1 R59.2 R60.1 R60.2 R61.1 R61.2 R62.1 R62.2 R63.1 R63.2 R64.1 R64.2 T1.1 T2.1 T3.1 T4.1 T5.1 T6.1 T7.1 T8.1 T9.1 T10.1 T11.1 T12.1 T13.1 TP1.1 TP2.1 TP3.1 TP4.1 U1.1 U1.2 U1.3 U1.4 U1.5 U1.6 U1.7 U1.8 U1.9 U1.10 U1.11 U1.12 U1.13 U1.14 U1.15 U1.16 U1.17 U1.18 U1.19 U1.20 U1.21 U1.22 U1.23 U1.24 U1.25 U1.26 U1.27 U1.28 U1.29 U1.30 U1.31 U1.32 U1.33 U1.34 U1.35 U1.36 U1.37 U1.38 U1.39 U1.40 U1_1.1 U1_1.2 U1_1.3 U1_1.4 U1_1.5 U1_1.6 U1_1.7 U1_1.8 U1_1.9 U1_1.10 U1_1.11 U1_1.12 U1_1.13 U1_1.14 U1_1.15 U1_1.16 U?_1.1 U?_1.2 U?_1.3 U?_1.4 U?_1.5 U?_1.6 U?_1.7 U?_1.8 U?_1.9 U?_1.10 U?_1.11 U?_1.12 U?_1.13 U?_1.14 U?_1.15 U?_1.16 U?_1.17 U?_1.18 U?_1.19 U?_1.20 U?_1.21 U?_1.22 U?_1.23 U?_1.24 U?_1.25 U?_1.26 U?_1.27 U?_1.28 U?_1.29 U?_1.30 U?_1.31 U?_1.32 U?_1.33